# Altium PCB Combined_PCB.PcbDoc
Units mm, origin at the board's own origin, x right, y up, seen from the top; angles counter-clockwise.
Board outline 100 x 60 mm, 4 copper layers (Top Layer, Internal Plane 1, Internal Plane 2, Bottom Layer), stack 0.462 mm thick; 37 components, 0 nets, 88 pads, 0 vias.
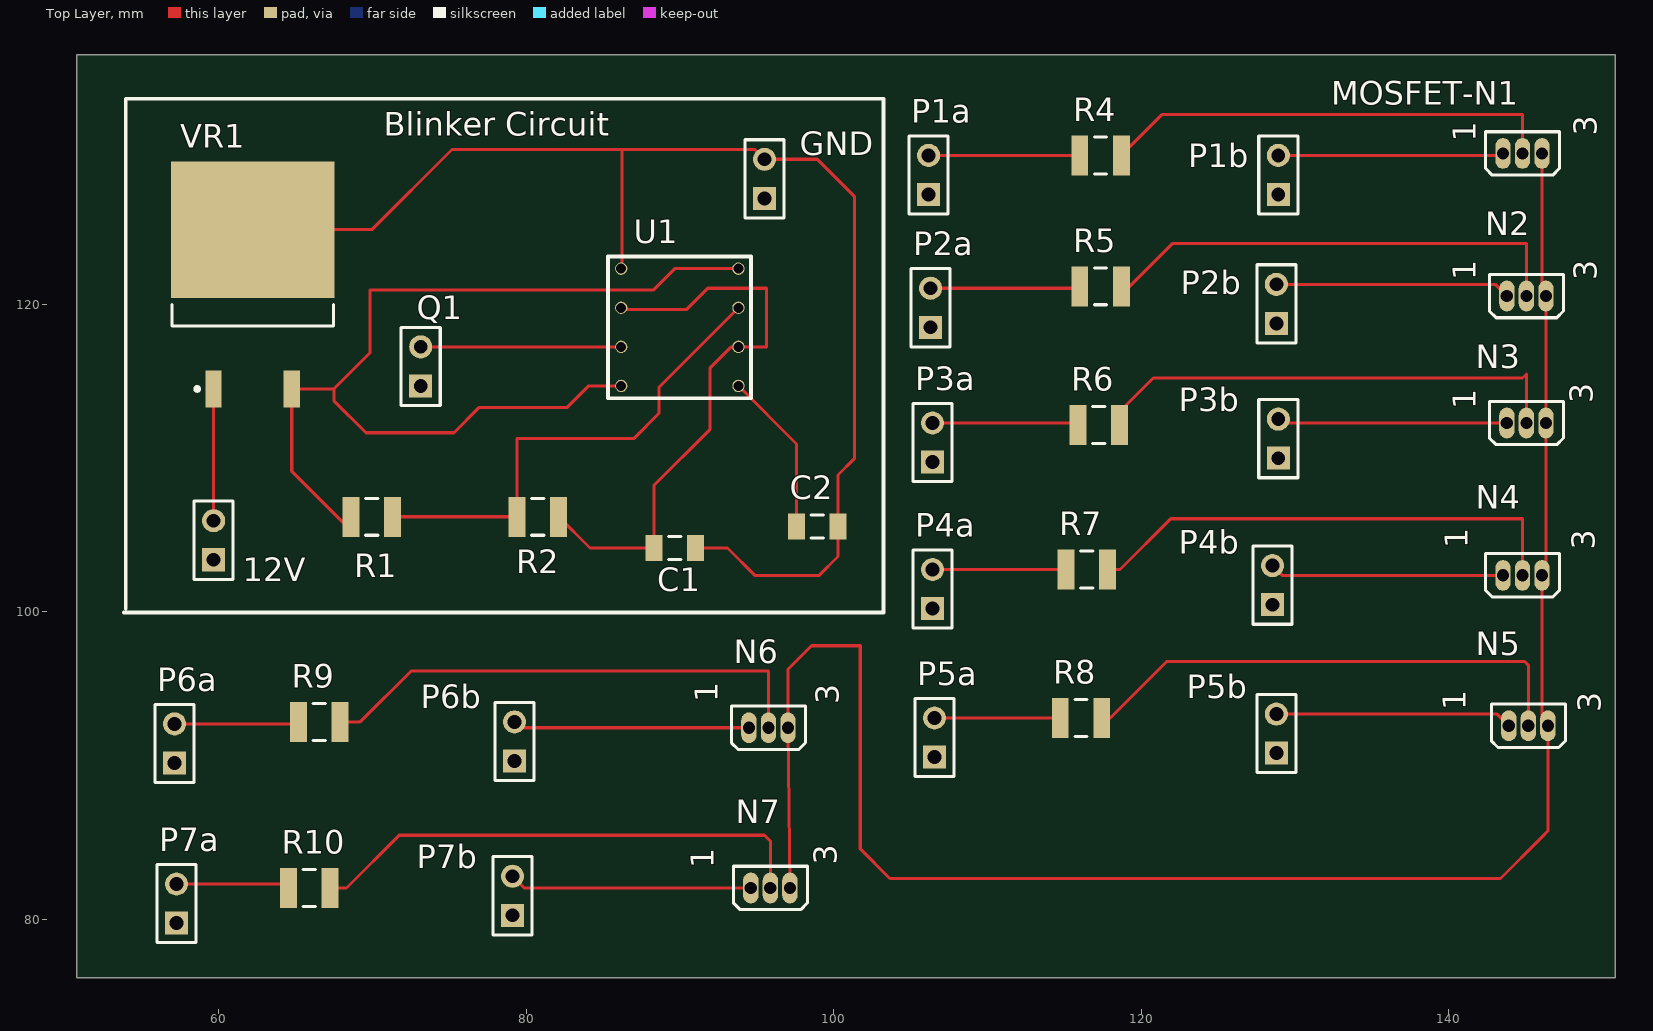
[diagram p0: Top Layer view]
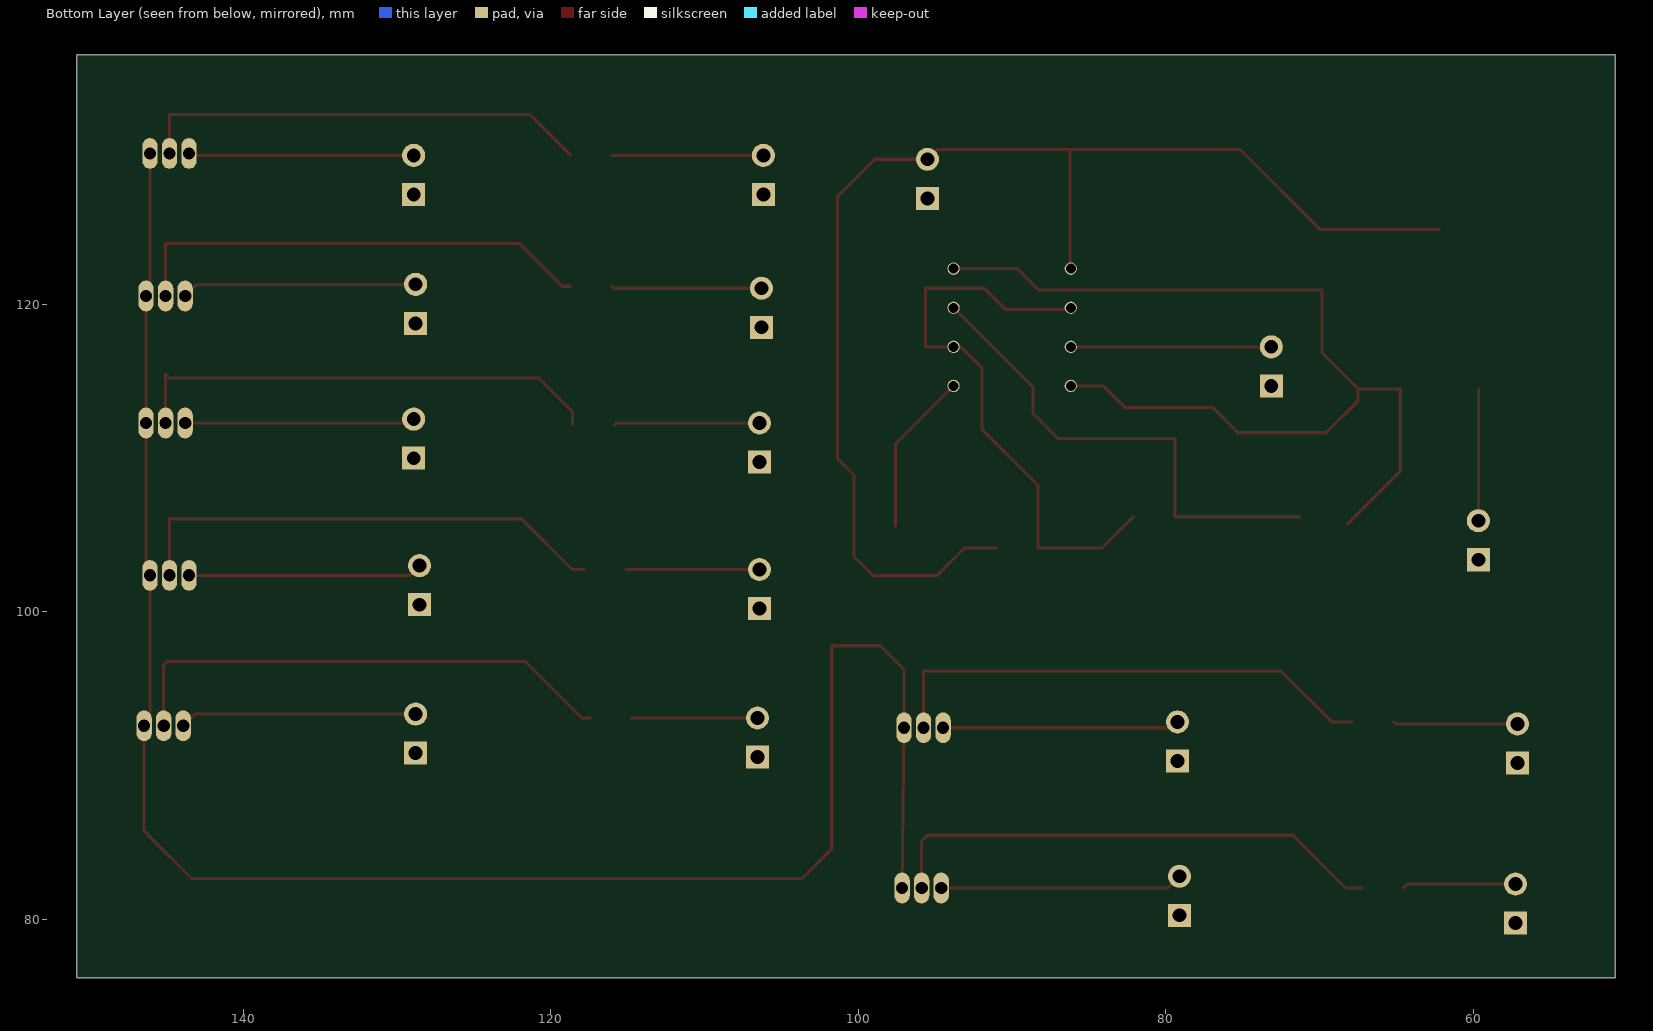
[diagram p1: Bottom Layer view, seen from below]
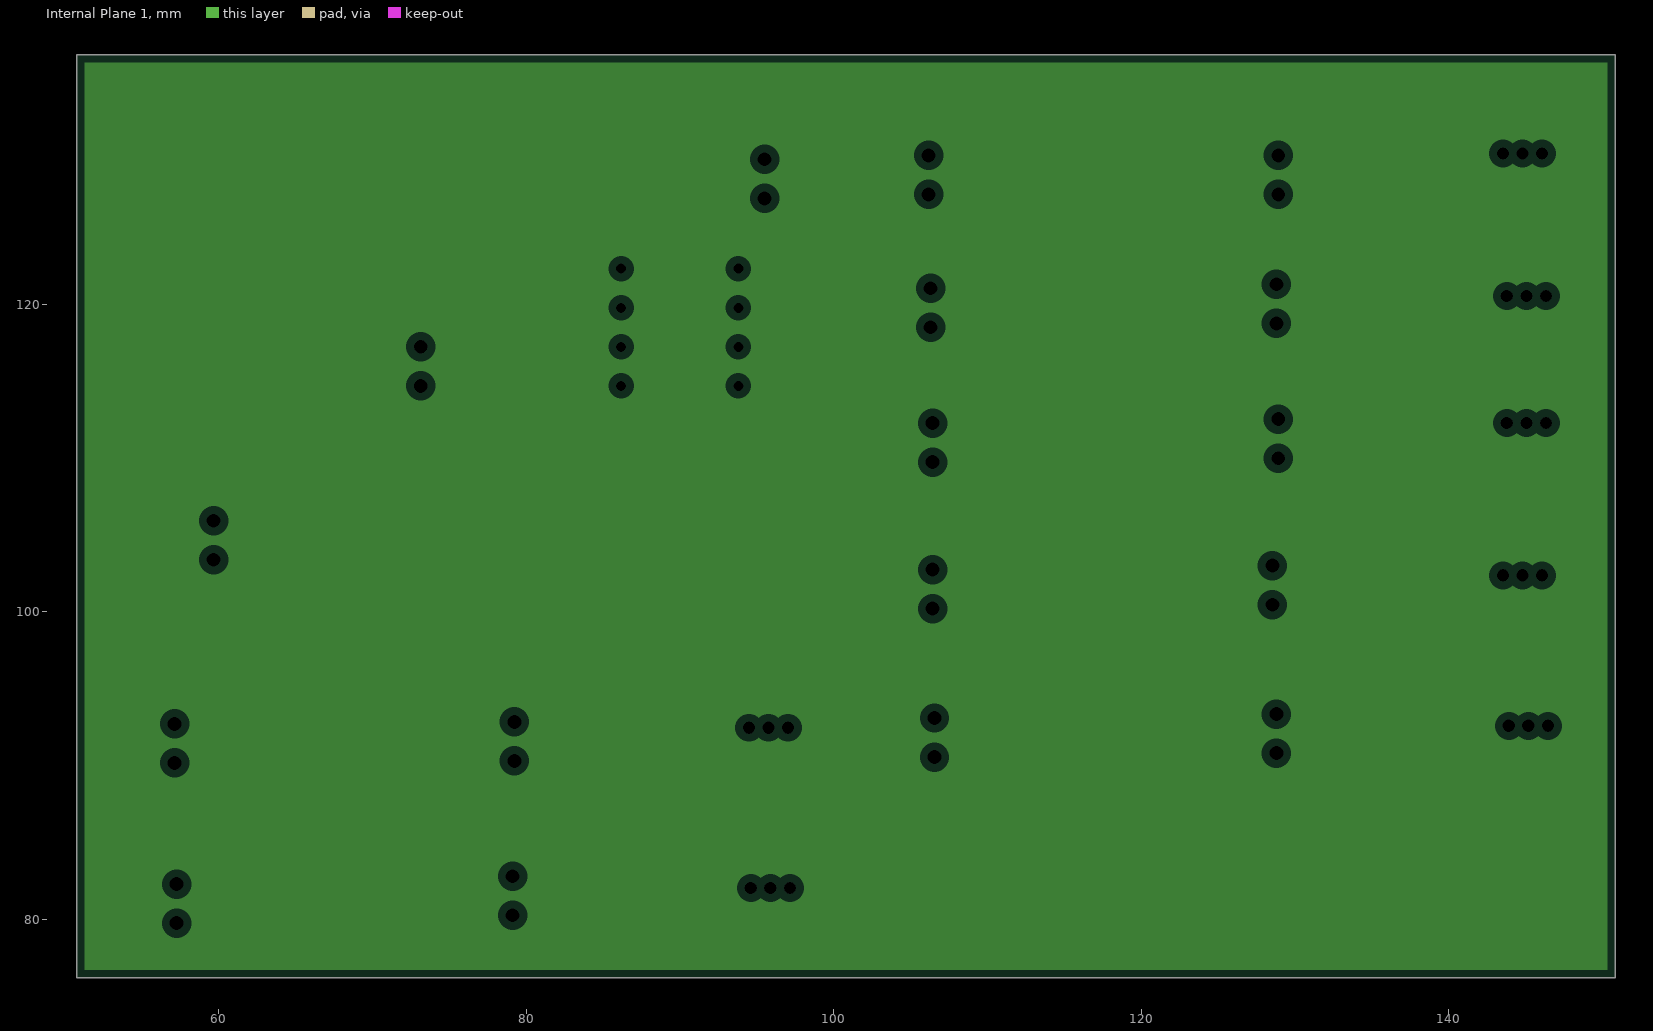
[diagram p2: Internal Plane 1, clearances drawn from the general rule]
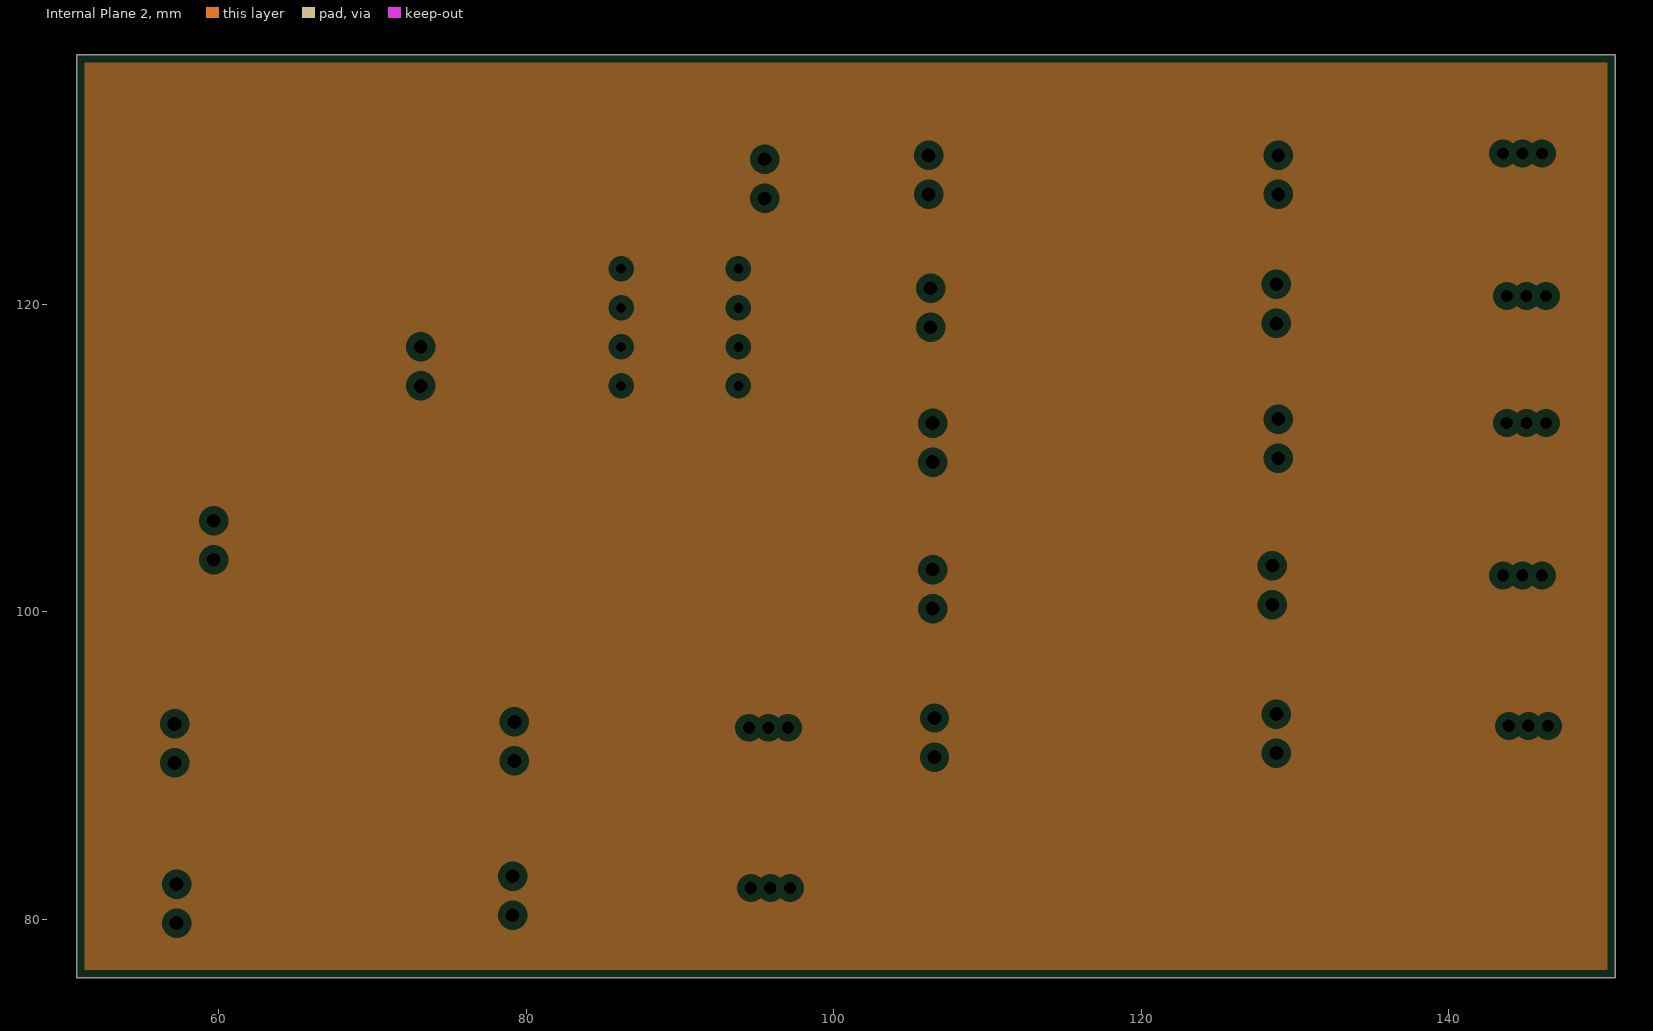
[diagram p3: Internal Plane 2, clearances drawn from the general rule]

## Layer stack, top to bottom
Top Solder: solder mask 0.0102, Solder Resist, Dk 3.5
Top Layer: signal copper 0.0356
Internal Plane 1: plane copper 0.0356
Internal Plane 2: plane copper 0.0356
Dielectric 1: dielectric 0.32, FR-4, Dk 4.8
Bottom Layer: signal copper 0.0356
Bottom Solder: solder mask 0.0102, Solder Resist, Dk 3.5

## Board outline
50.8,76.2 150.8,76.2 150.8,136.2 50.8,136.2

## Design rules (kind name [scope] priority, off if disabled: settings)
Clearance [All] p1: gap=0.2
PlaneClearance [All] p1: clearance=0.508
PlaneConnect [All] p1: planeconnectstyle=Relief reliefexpansion=0.508 reliefentries=4 reliefconductorwidth=0.254 reliefairgap=0.254
PolygonConnect [All] p1: connectstyle=Relief reliefconductorwidth=0.254 reliefentries=4 polygonreliefangle="90 Angle" airgapwidth=0.254
RoutingVias [All] p1: holewidth=0.6 width=1 viastyle="Through Hole" minholewidth=0.711 minwidth=1.27 maxholewidth=0.711 maxwidth=1.27
SolderMaskExpansion [All] p1: expansion=0.102
UnpouredPolygon [All] p1: allowunpoured=FALSE
Width [All] p1: maxlimit=0.2 minlimit=0.2 preferedwidth=0.2
27 further rules are at their usual default settings.

## Components (designator, comment, footprint, x,y, rotation, side; value= is the part's Value field where it differs from the comment)
12V "Header 2" HDR1X2 59.69,103.378 r90 top (schematic designator P1)
C1 "Cap Semi" C1206 89.662,104.14 r0 top
C2 "Cap Semi" C1206 98.933,105.537 r0 top
GND "Header 2" HDR1X2 95.504,126.873 r90 top (schematic designator P3)
MOSFET-N1 "" E3 144.78,129.794 r90 top
N2 "" E3 145.034,120.523 r90 top (schematic designator MOSFET-N2)
N3 "" E3 145.034,112.268 r90 top (schematic designator MOSFET-N3)
N4 "" E3 144.78,102.362 r90 top (schematic designator MOSFET-N5)
N5 "" E3 145.161,92.583 r90 top (schematic designator MOSFET-N6)
N6 "" E3 95.758,92.456 r90 top (schematic designator MOSFET-N7)
N7 "" E3 95.885,82.042 r90 top (schematic designator MOSFET-N8)
P1a "Header 2" HDR1X2 106.172,127.127 r90 top (schematic designator P4)
P1b "Header 2" HDR1X2 128.905,127.127 r90 top (schematic designator P14)
P2a "Header 2" HDR1X2 106.299,118.491 r90 top (schematic designator P5)
P2b "Header 2" HDR1X2 128.778,118.745 r90 top (schematic designator P15)
P3a "Header 2" HDR1X2 106.426,109.728 r90 top (schematic designator P6)
P3b "Header 2" HDR1X2 128.905,109.982 r90 top (schematic designator P16)
P4a "Header 2" HDR1X2 106.426,100.203 r90 top (schematic designator P7)
P4b "Header 2" HDR1X2 128.524,100.457 r90 top (schematic designator P17)
P5a "Header 2" HDR1X2 106.553,90.551 r90 top (schematic designator P8)
P5b "Header 2" HDR1X2 128.778,90.805 r90 top (schematic designator P18)
P6a "Header 2" HDR1X2 57.15,90.17 r90 top (schematic designator P9)
P6b "Header 2" HDR1X2 79.248,90.297 r90 top (schematic designator P19)
P7a "Header 2" HDR1X2 57.277,79.756 r90 top (schematic designator P10)
P7b "Header 2" HDR1X2 79.121,80.264 r90 top (schematic designator P20)
Q1 "Header 2" HDR1X2 73.152,114.681 r90 top (schematic designator P2)
R1 "Res3" 14-1210 69.977,106.172 r0 top
R2 "Res3" 14-1210 80.772,106.172 r0 top
R4 "Res3" 14-1210 117.348,129.667 r0 top
R5 "Res3" 14-1210 117.348,121.158 r0 top
R6 "Res3" 14-1210 117.221,112.141 r0 top
R7 "Res3" 14-1210 116.459,102.743 r0 top
R8 "Res3" 14-1210 116.078,93.091 r0 top
R9 "Res3" 14-1210 66.548,92.837 r0 top
R10 "Res3" 14-1210 65.913,82.042 r0 top
U1 "Component_2" 555 1320.626,1346.581 r0 top
VR1 "Voltage Regulator" D2PAK_N 62.23,121.285 r90 top

## Footprints (in the part's own frame and the unit in brackets; to place one, negate y for a bottom-side part, rotate by r counter-clockwise, add the part's x,y. Pads: shape width x height; smd on the part's side, far side on the other; paste and mask are expansions set on the pad)
14-1210 [mm] "Chip Resistor, Body 3.2x2.5mm, IPC High Density"
  rect 1.1x2.6 smd: 1(-1.35,0) 2(1.35,0)
  silkscreen extent -0.4,-1.2 0.4,1.2, body extent -1.68,-1.32 1.68,1.32, height 0.9
555 [mm]
  round 0.8 hole 0.65: 1(-1234.44,-1231.9) 1(-1234.44,-1229.36) 1(-1234.44,-1226.82) 1(-1234.44,-1224.28) 1(-1226.82,-1231.9) 1(-1226.82,-1229.36) 1(-1226.82,-1226.82) 1(-1226.82,-1224.28)
  silkscreen extent -1235.3,-1232.7 -1226,-1223.5
C1206 [mm] "Chip Capacitor, Body 3.2x1.6mm, IPC High Density"
  rect 1.1x1.7 smd: 1(-1.35,0) 2(1.35,0)
  silkscreen extent -0.4,-0.75 0.4,0.75, body extent -1.7,-0.9 1.7,0.9, height 1.3
D2PAK_N [mm] "D2-PAK, 4-Leads, Body 8.8x10.4mm, Pitch 2.54mm, Lead Span 15.1mm, IPC Medium Density"
  rect 2.4x1.05 smd: 1(-6.8,2.54) 3(-6.8,-2.54)
  rect 8.9x10.65 smd: 2(3.55,0)
  silkscreen extent -6.92,-5.25 -1.3,5.25, body extent -2.7,-5.28 6.3,5.28, height 4.69
E3 [mm] "TO, Flat Index; 3 In-Line, Axial Leads; Body Dia. 4.6mm; Lead Dia. 0.5 mm (max)"
  oval 2x1 hole 0.8: 1(0,1.27) 2(0,0) 3(0,-1.27)
  silkscreen extent -1.41,-2.41 1.41,2.41
HDR1X2 [mm] "Connector; Header; 2 Position"
  rect 1.5x1.5 hole 0.9: 1(0,0)
  round 1.5 hole 0.9: 2(2.54,0)
  silkscreen extent -1.27,-1.27 3.81,1.27

## Part data
12V GND P1a P1b P2a P2b P3a P3b P4a P4b P5a P5b P6a P6b P7a P7b Q1: "Header, 2-Pin"
C1 C2: "Capacitor (Semiconductor SIM Model)"
MOSFET-N1 N2 N3 N4 N5 N6 N7: library part MOSFET-N, "N-Channel MOSFET"
R1 R2 R4 R5 R6 R7 R8 R9 R10: "Resistor"
VR1: library part "Volt Reg"

## Nets (pads, with @x,y where several pads share a name; then routed paths per layer and width w, separated by ;. In a path a pad name is that pad's centre, name@x,y a point inside that pad or via, vN(x,y) a via of type N, cw(c..) or ccw(c..) an arc to the next point about the centre after c; other vN are vias at no path point)
pads on no net: 12V.1 12V.2 C1.1 C1.2 C2.1 C2.2 GND.1 GND.2 MOSFET-N1.1 MOSFET-N1.2 MOSFET-N1.3 N2.1 N2.2 N2.3 N3.1 N3.2 N3.3 N4.1 N4.2 N4.3 N5.1 N5.2 N5.3 N6.1 N6.2 N6.3 N7.1 N7.2 N7.3 P1a.1 P1a.2 P1b.1 P1b.2 P2a.1 P2a.2 P2b.1 P2b.2 P3a.1 P3a.2 P3b.1 P3b.2 P4a.1 P4a.2 P4b.1 P4b.2 P5a.1 P5a.2 P5b.1 P5b.2 P6a.1 P6a.2 P6b.1 P6b.2 P7a.1 P7a.2 P7b.1 P7b.2 Q1.1 Q1.2 R1.1 R1.2 R2.1 R2.2 R4.1 R4.2 R5.1 R5.2 R6.1 R6.2 R7.1 R7.2 R8.1 R8.2 R9.1 R9.2 R10.1 R10.2 U1.1 VR1.1 VR1.2 VR1.3
copper on no net: | length 770.2
  Top Layer w0.2: 57.15,92.71 65.071,92.71 65.198,92.837 ; 57.277,82.296 64.309,82.296 64.563,82.042 ; 59.69,105.918 59.69,114.485 ; 62.23,124.835 69.971,124.835 75.184,130.048 86.233,130.048 ; 67.263,82.042 68.326,82.042 71.755,85.471 95.504,85.471 95.885,85.09 95.885,82.042 ; 67.898,92.837 69.215,92.837 72.517,96.139 95.758,96.139 95.758,92.456 ; 68.183,105.728 64.77,109.14 64.77,114.485 67.506,114.485 ; 71.327,106.172 79.422,106.172 79.422,111.252 86.995,111.252 88.646,112.903 88.646,114.601 93.806,119.761 ; 73.152,117.221 81.614,117.221 86.186,117.221 ; 79.121,82.804 79.883,82.042 94.615,82.042 ; 79.248,92.837 79.629,92.456 94.488,92.456 ; 82.122,106.172 84.154,104.14 88.312,104.14 88.312,108.204 91.948,111.84 91.948,115.824 93.345,117.221 93.806,117.221 95.631,117.221 95.631,121.031 91.821,121.031 90.424,119.634 86.313,119.634 86.186,119.761 ; 86.186,114.681 84.074,114.681 82.677,113.284 76.962,113.284 75.311,111.633 69.596,111.633 67.506,113.723 67.506,114.485 ; 86.186,122.301 86.233,122.348 86.233,130.048 ; 91.012,104.14 93.091,104.14 94.869,102.362 99.06,102.362 100.283,103.585 100.283,105.537 100.283,108.886 101.346,109.949 101.346,127 98.933,129.413 95.504,129.413 94.869,130.048 86.233,130.048 ; 93.806,114.681 97.583,110.904 97.583,105.537 ; 93.806,122.301 89.662,122.301 88.265,120.904 69.85,120.904 69.85,116.829 67.506,114.485 ; 97.155,82.042 97.028,92.456 ; 97.409,92.075 97.028,92.456 ; 106.172,129.667 115.998,129.667 ; 106.299,121.031 115.871,121.031 115.998,121.158 ; 106.426,102.743 115.109,102.743 ; 106.426,112.268 115.744,112.268 115.871,112.141 ; 106.553,93.091 114.728,93.091 ; 117.428,93.091 117.983,93.091 121.666,96.774 144.907,96.774 145.161,96.52 145.161,92.583 ; 117.809,102.743 118.618,102.743 121.92,106.045 144.78,106.045 144.78,102.362 ; 118.571,112.141 118.571,112.983 120.777,115.189 144.78,115.189 145.034,115.443 145.034,112.268 ; 118.698,121.158 119.253,121.158 122.047,123.952 145.034,123.952 145.034,120.523 ; 118.698,129.667 121.365,132.334 144.78,132.334 144.78,129.794 ; 128.524,102.997 129.159,102.362 143.51,102.362 ; 128.778,93.345 143.129,93.345 143.891,92.583 ; 128.778,121.285 143.002,121.285 143.764,120.523 ; 128.905,112.522 129.159,112.268 143.764,112.268 ; 128.905,129.667 143.383,129.667 143.51,129.794 ; 146.05,129.794 146.05,120.777 146.304,120.523 146.304,112.268 146.304,102.616 146.05,102.362 146.05,92.964 146.431,92.583 146.431,85.744 146.031,85.344 143.345,82.658 103.651,82.658 101.727,84.582 101.727,97.79 98.552,97.79 97.028,96.266 97.028,92.456

## Silkscreen, mask and mechanical layers (free items; w line width, h text height)
Top Overlay:
  lines w0.254: 53.848,99.949 86.868,99.949 ; 53.975,100.203 53.975,133.223 ; 53.975,133.35 86.995,133.35 ; 70.231,99.949 103.251,99.949 103.251,133.35 70.231,133.35
  text "Blinker Circuit" at 70.739,130.937 h1.52

## Text inside footprints (layer, text, board x,y; h text height)
MOSFET-N1: Top Overlay "1" at 141.732,130.556 h1.5 r90; Top Overlay "3" at 149.606,130.937 h1.5 r90
N2: Top Overlay "1" at 141.732,121.539 h1.5 r90; Top Overlay "3" at 149.606,121.539 h1.5 r90
N3: Top Overlay "1" at 141.732,113.157 h1.5 r90; Top Overlay "3" at 149.352,113.538 h1.5 r90
N4: Top Overlay "1" at 141.224,104.14 h1.5 r90; Top Overlay "3" at 149.479,104.013 h1.5 r90
N5: Top Overlay "1" at 141.097,93.599 h1.5 r90; Top Overlay "3" at 149.86,93.472 h1.5 r90
N6: Top Overlay "1" at 92.456,94.107 h1.5 r90; Top Overlay "3" at 100.33,93.98 h1.5 r90
N7: Top Overlay "1" at 92.202,83.312 h1.5 r90; Top Overlay "3" at 100.203,83.566 h1.5 r90